# Altium PCB PCB1.PcbDoc
Units mil, origin at the board's own origin, x right, y up, seen from the top; angles counter-clockwise.
Board outline 2062.9 x 1175.4 mil, 2 copper layers (Top Layer, Bottom Layer); 13 components, 40 nets, 101 pads, 12 vias.
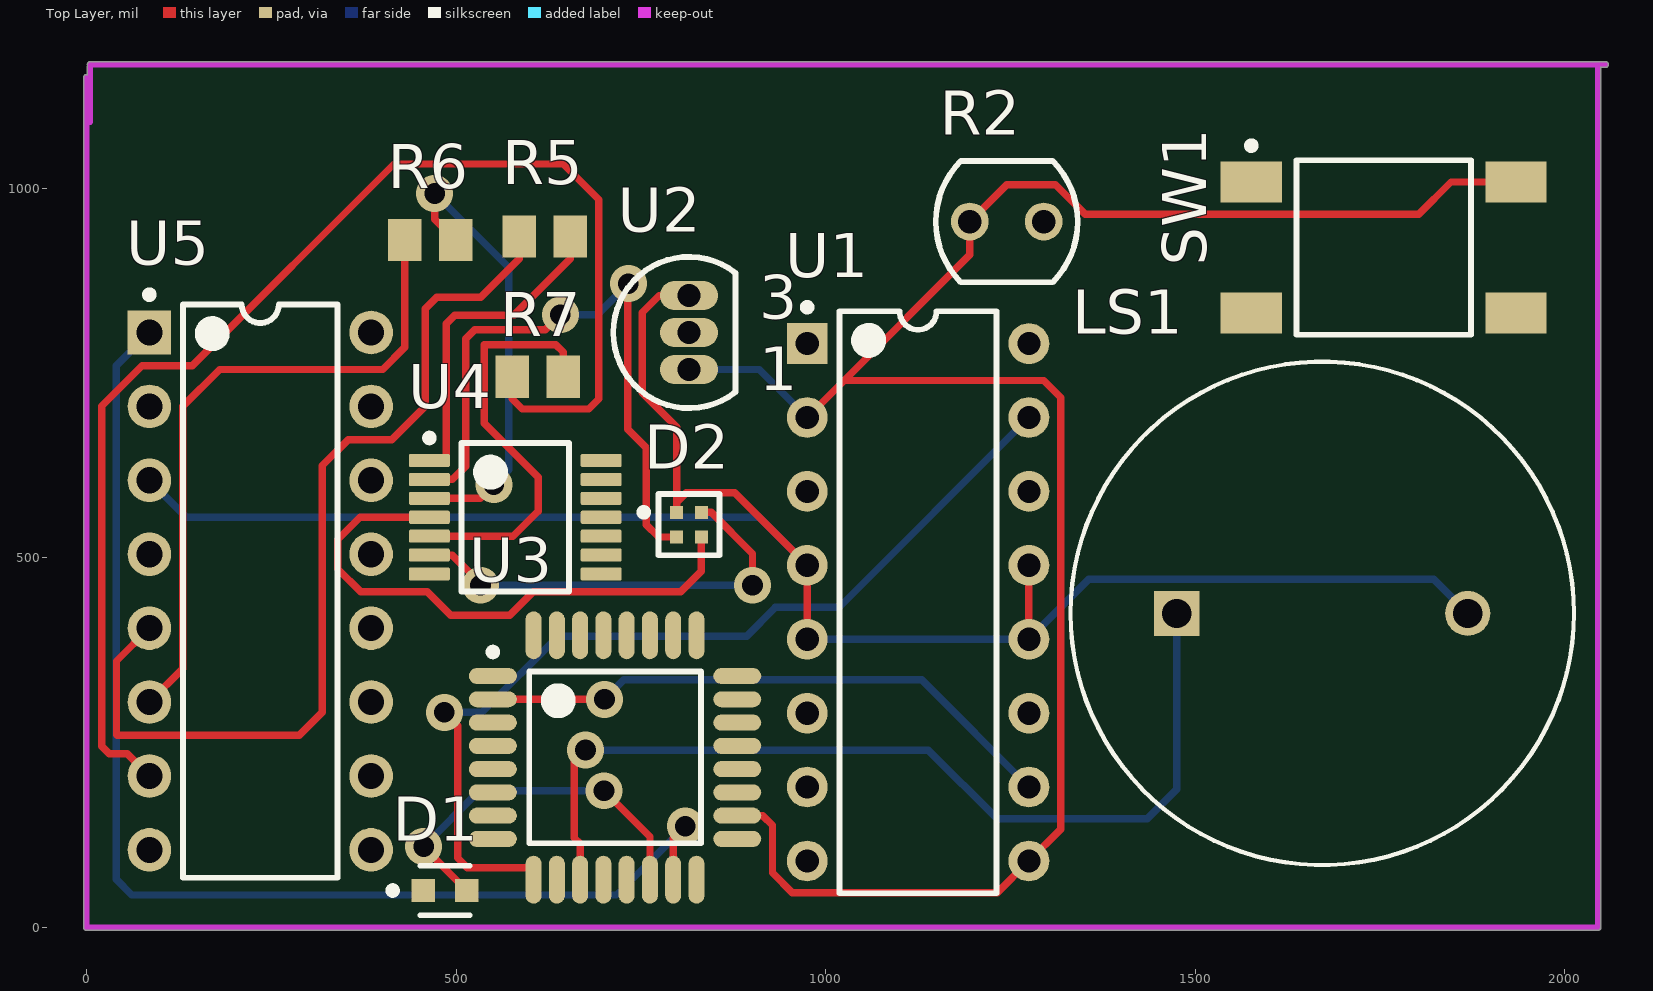
[diagram p0: Top Layer view]
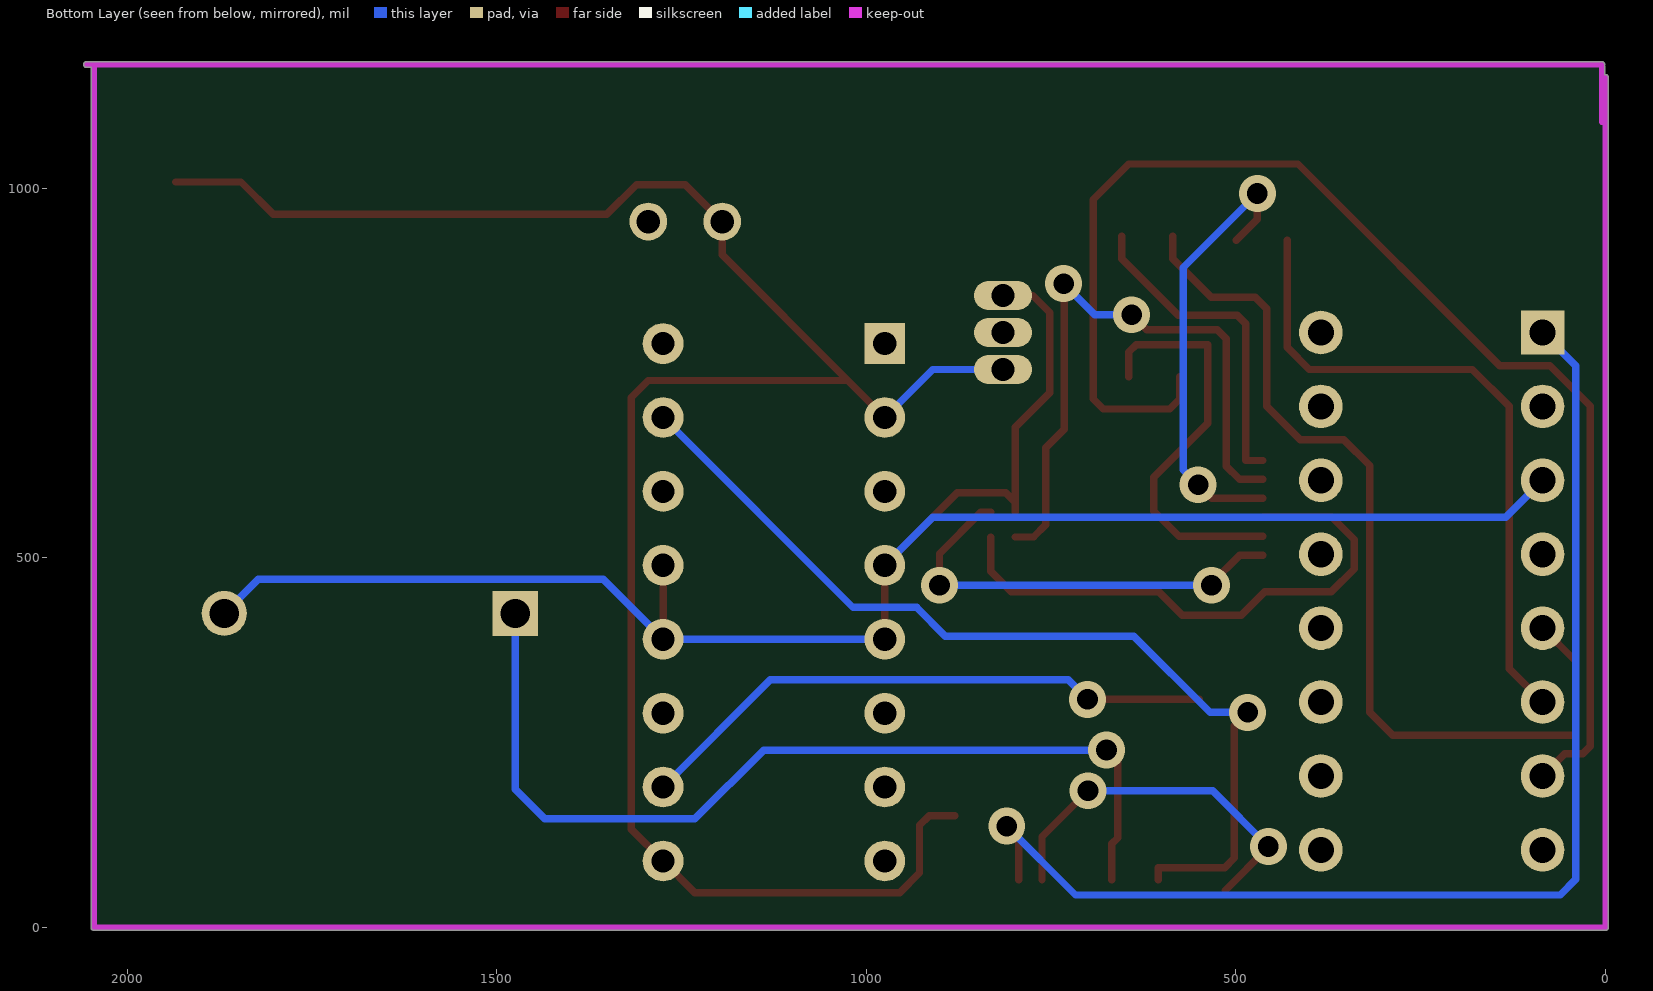
[diagram p1: Bottom Layer view, seen from below]

## Layer stack, top to bottom
Top Solder: solder mask 0.4, Solder Resist, Dk 3.5
Top Layer: signal copper 1.4
Dielectric 1: dielectric 12.6, FR-4, Dk 4.8
Bottom Layer: signal copper 1.4
Bottom Solder: solder mask 0.4, Solder Resist, Dk 3.5

## Board outline
-3.95,0 -3.95,1150 cw(c0,1150) 1.05,1153.81 1.05,1165 1.25,1166.25 cw(c5,1167.5) 5,1171.45 2055,1171.45 cw(c2055,1167.5) 2058.95,1167.5 cw(c2055,1167.5) 2055,1163.55 2048.95,1163.55 2048.95,0 cw(c2045,0) 2045,-3.95 0,-3.95 cw(c0,0)

## Design rules (kind name [scope] priority, off if disabled: settings)
Clearance [All] p1: gap=10 ignorepadtopadclearanceinfootprint=FALSE
PolygonConnect [All] p1: connectstyle=Relief reliefconductorwidth=10 reliefentries=4 polygonreliefangle="90 Angle" airgapwidth=10
RoutingVias [All] p1: holewidth=28 width=50 viastyle="Through Hole" minholewidth=28 minwidth=50 maxholewidth=28 maxwidth=50
SolderMaskExpansion [All] p1: expansion=4 istentingtop=FALSE
Width [All] p1: maxlimit=10 minlimit=10 preferedwidth=10
30 further rules are at their usual default settings.

## Components (designator, comment, footprint, x,y, rotation, side; value= is the part's Value field where it differs from the comment)
D1 "LTST-C190GKT" FP-LTST-C190GKT-MFG 485,50 r0 top
D2 "SML-LX0404SIUPGUSB" FP-SML-LX0404SIUPGUSB-MFG 815,545 r0 top
LS1 "PS1720P02" FP-PS1720P02-MFG 1671.85,425 r0 top
R2 "VT90N1" EXCE-VT90N1 1245,955 r0 top
R5 "ERJ6ENF2200V" RESC2013X70X40NL20T20 620,935 r0 top
R6 "ERJ6ENF2200V" RESC2013X70X40NL20T20 465,930 r0 top
R7 "ERJ6ENF2200V" RESC2013X70X40NL20T20 610.55,745 r0 top
SW1 "FSM6JSMA" TECO-FSM6JSMA_V 1755,920 r90 top
U1 "L293D" STM-L293D-16 1125,440 r0 top
U2 "TMP36GT9Z" ADI-T-3 815,805 r0 top
U3 "ATmega8A-AU" 32A_N 715,230 r0 top
U4 "SN74HCT04PWT" PW0014A_N 580,555 r0 top
U5 "SN74HC139N" N0016A 235,455 r0 top

## Footprints (in the part's own frame and the unit in brackets; to place one, negate y for a bottom-side part, rotate by r counter-clockwise, add the part's x,y. Pads: shape width x height; smd on the part's side, far side on the other; paste and mask are expansions set on the pad)
32A_N [mm] "Thin QFP, 32-Leads, Body 7x7mm, Pitch 0.8mm, IPC Medium Density"
  oval 1.65x0.55 smd: 1(-4.2,2.8) 2(-4.2,2) 3(-4.2,1.2) 4(-4.2,0.4) 5(-4.2,-0.4) 6(-4.2,-1.2) 7(-4.2,-2) 8(-4.2,-2.8) 17(4.2,-2.8) 18(4.2,-2) 19(4.2,-1.2) 20(4.2,-0.4) 21(4.2,0.4) 22(4.2,1.2) 23(4.2,2) 24(4.2,2.8)
  oval 0.55x1.65 smd: 9(-2.8,-4.2) 10(-2,-4.2) 11(-1.2,-4.2) 12(-0.4,-4.2) 13(0.4,-4.2) 14(1.2,-4.2) 15(2,-4.2) 16(2.8,-4.2) 25(2.8,4.2) 26(2,4.2) 27(1.2,4.2) 28(0.4,4.2) 29(-0.4,4.2) 30(-1.2,4.2) 31(-2,4.2) 32(-2.8,4.2)
  silkscreen extent -4.32,-2.95 2.95,3.75, body extent -3.5,-3.5 3.5,3.5, height 1.2
ADI-T-3 [mm] "TO, Flat Index; 3 In-Line, Axial Leads; Body Dia. 5.1mm; Leads 0.48 x 0.48 mm (max)"
  oval 2x1 hole 0.8: 1(0,-1.27) 2(0,0) 3(0,1.27)
  silkscreen extent -2.6,-2.6 1.6,2.6, body extent -2.6,-2.61 1.6,2.61, height 5.33
EXCE-VT90N1 [mm] "THD, 2-Leads, Body Width 4.17mm (Max), Height 2.29mm"
  round 1.3 hole 0.8: 1(-1.27,0) 2(1.27,0)
  silkscreen extent -2.44,-2.08 2.44,2.08, body extent -2.44,-2.09 2.44,2.09, height 2.29
FP-LTST-C190GKT-MFG [mm]
  rect 0.8x0.8 smd paste+0 mask+0: 1(-0.75,0) 2(0.75,0)
  silkscreen extent -1.92,-0.85 0.85,0.85, body extent -1.25,-0.55 1.25,0.55, height 0.25
FP-PS1720P02-MFG [mm]
  rect 1.55x1.55 hole 1 paste-2539.97 mask+0: 1(-5,0)
  round 1.55 hole 1 paste-2539.97 mask+0: 2(5,0)
  silkscreen extent -8.65,-8.65 8.65,8.65, body extent -8.75,-8.75 8.75,8.75, height 0.25
FP-SML-LX0404SIUPGUSB-MFG [mm]
  rect 0.45x0.45 smd paste+0 mask+0: 1(-0.425,0.425) 2(0.425,0.425) 3(0.425,-0.425) 4(-0.425,-0.425)
  silkscreen extent -1.67,-1.05 1.05,1.05, body extent -0.85,-0.85 0.85,0.85, height 0.25
N0016A [mm] "DIP, 16-Leads, Body 19.7x6.6mm, Pitch 2.54mm"
  rect 1.5x1.5 hole 0.9: 1(-3.81,8.89)
  round 1.5 hole 0.9: 2(-3.81,6.35) 3(-3.81,3.81) 4(-3.81,1.27) 5(-3.81,-1.27) 6(-3.81,-3.81) 7(-3.81,-6.35) 8(-3.81,-8.89) 9(3.81,-8.89) 10(3.81,-6.35) 11(3.81,-3.81) 12(3.81,-1.27) 13(3.81,1.27) 14(3.81,3.81) 15(3.81,6.35) 16(3.81,8.89)
  silkscreen extent -3.93,-9.85 2.65,10.31, body extent -3.95,-9.85 3.95,9.85, height 5.08
PW0014A_N [mm] "SOP, 14-Leads, Body 5.1x4.5mm, Pitch 0.65mm, IPC Medium Density"
  rrect22% 1.4x0.45 smd: 1(-2.95,1.95) 2(-2.95,1.3) 3(-2.95,0.65) 4(-2.95,0) 5(-2.95,-0.65) 6(-2.95,-1.3) 7(-2.95,-1.95) 8(2.95,-1.95) 9(2.95,-1.3) 10(2.95,-0.65) 11(2.95,0) 12(2.95,0.65) 13(2.95,1.3) 14(2.95,1.95)
  silkscreen extent -3.07,-2.55 1.85,2.85, body extent -3.21,-2.5 3.21,2.5, height 1
RESC2013X70X40NL20T20 [mm] "Chip Resistor, 2-Leads, Body 2.00x1.25mm, IPC Medium Density"
  rect 1.15x1.45 smd: 1(-0.875,0) 2(0.875,0)
  body extent -1.1,-0.72 1.1,0.72, height 0.7
STM-L293D-16 [mm] "DIP, 16-Leads, Body 20x6.85mm, Pitch 2.54mm"
  rect 1.4x1.4 hole 0.8: 1(-3.81,8.89)
  round 1.4 hole 0.8: 2(-3.81,6.35) 3(-3.81,3.81) 4(-3.81,1.27) 5(-3.81,-1.27) 6(-3.81,-3.81) 7(-3.81,-6.35) 8(-3.81,-8.89) 9(3.81,-8.89) 10(3.81,-6.35) 11(3.81,-3.81) 12(3.81,-1.27) 13(3.81,1.27) 14(3.81,3.81) 15(3.81,6.35) 16(3.81,8.89)
  silkscreen extent -3.93,-10 2.7,10.26, body extent -3.93,-10 3.93,10, height 5.1
TECO-FSM6JSMA_V [mm] "SMD, 4-Leads, Body 6x6mm, Pitch 4.5mm"
  rect 1.4x2.1 smd: 1(2.25,4.55) 2(2.25,-4.55) 3(-2.25,4.55) 4(-2.25,-4.55)
  silkscreen extent -3,-3 3.62,4.67, body extent -3,-5 3,5, height 7.11

## Part data
D1: library part CMP-22017-000005-2, "LED GREEN CLEAR CHIP SMD", Case Code (Imperial)=0603, Case Code (Metric)=1608, Color=Green, Forward Current=30mA, Forward Voltage=2.1V, Lens Color=Colorless, Max Operating Temperature=85°C, Min Operating Temperature=-55°C, Package Quantity=1, Power Dissipation=100mW, Reverse Voltage=5V, Test Current=10mA, Voltage=2V, Case/Package=0603, Depth=0.8mm, Dominant Wavelength=569nm, Height=0.8mm, Illumination Color=Green, Lead Free="Lead Free", Length=1.6mm, Lens Style=Clear, Lens Transparency=Clear, Luminous Intensity=6mcd, Mount="Surface Mount", Number of Elements=1, Number of LEDs=1, Number of Pins=2, Packaging="Tape and Reel", Power Rating=100mW, Radiation Hardening=No, Viewing Angle=130°, Wavelength=565nm, Width=0.8mm
D2: library part CMP-2000-07119-2, "LED RGB CLEAR SMD", Case Code (Imperial)=0404, Case Code (Metric)=1010, Color=Blue, Forward Current=2mA, Forward Voltage=2.73V, Lens Color=Colorless, Max Operating Temperature=85°C, Min Operating Temperature=-40°C, Package Quantity=2000, Power Rating=30mW, Case/Package=0404, Height=0.3mm, Lead Free="Lead Free", Length=1mm, Lens Style=Square, Lens Transparency=Clear, Luminous Intensity=20mcd, Mount="Surface Mount", Number of LEDs=3, Packaging="Tape and Reel", REACH SVHC="No SVHC", Test Current=2mA, Viewing Angle=120°, Wavelength=465nm, Width=1mm
LS1: library part CMP-08413-000001-1, "AUDIO PIEZO TRANSDUCER 30V TH", Frequency=2kHz, Manufacturer="TDK Corporation", Package=0, Temperature="-10°C to +70°C", Temperature Range High=+70°C, Temperature Range Low=-10°C, Automotive=No, Category=Speak, ComponentLink2Description=Datasheet, ComponentLink2URL=https://product.tdk.com/info/en/catalog/datasheets/piezoelectronic_buzzer_ps_en.pdf, Device Class L1=Electromechanical, Device Class L2="Audio Products", Device Class L3=Buzzers, Digikey Description="AUDIO PIEZO TRANSDUCER 30V TH", Height=8.3mm, Lead Free=Yes, Manufacturer Part Number=PS1720P02, Mouser Description="Audio Indicators & Alerts Round 17mmx8mm 2 kHz Vin=3V", Octopart=https://octopart.com/ps1720p02-tdk-154429, RoHS=TRUE, Standoff Height=0.5mm
R2: library part CMP-2000-07406-1, "Photoconductive Resistor, 200 kOhm, 100 V, 80 mW, -40 to 75 degC, 2-Pin THD, RoHS", Dark Resistance=200kohm, Manufacturer="Excelitas Technology", Operating Temperature Max=75°C, Operating Temperature Min=-40°C, Package Description="2-Pin Through Hole Device, Body Width 4.17 mm (Max), Height 2.29 mm", Power Rating=80mW, Resistance @ Lux=12kohm, Resistor Case Style=-, Voltage Rating=100V, Datasheet URL=http://datasheet.octopart.com/VT90N1-Excelitas-datasheet-10388451.pdf, Datasheet Version=09/2006, Manufacturer URL=http://www.excelitas.com/Pages/Index.aspx, Mounting Technology=ThroughHole, Package Reference=VT90N1, Packaging=Each, Product Range=-, SVHC=Cadmiumchloride(15-Jun-2015)
R5 R6 R7: library part CMP-2001-00044-1, Manufacturer=Panasonic, Part Number=ERJ6ENF2200V
SW1: library part CMP-2000-07503-1, "Switch, SPST, 24 V, -35 to 85 degC, 4-Pin SMD, RoHS, Tape and Reel", Case\/Package=SMD/SMT, Contact Current Rating=50mA, Contact Resistance=100mOhm, Insulation Resistance=100MOhm, Manufacturer="TE Connectivity", Max Operating Temperature=85degC, Max Voltage Rating (DC)=12V, Min Operating Temperature=-35degC, Operating Force=1.57N, Package Description="4-Pin Surface Mount Device, Body 6 x 6 mm, Pitch 4.5 mm", Package Quantity=750, Voltage Rating=24V, Actuator Length=3.4mm, Actuator Material=Polyamide, Contact Material=CopperAlloy, Contact Plating=Silver, Current Rating=50mA, Datasheet URL=http://www.te.com/commerce/DocumentDelivery/DDEController?Action=showdoc&DocId=Customer+Drawing%7F2-1437565-7%7FV%7Fpdf%7FEnglish%7FENG_CD_2-1437565-7_V.pdf%7F4-1437565-9, Datasheet Version="Rev. V, 02/2015", Electrical Life=100000Cycles, ELV=Compliant, Illumination Type=Illuminated, Lead Free=LeadFree, Length=6mm, Manufacturer URL=http://www.te.com/, Mechanical Life=100000Cycles, Mount=SurfaceMount, Mounting Technology=SurfaceMount, Orientation=Straight, Package Reference=FSM6JSMA, Packaging=LoosePiece, REACH SVHC=Unknown, RoHSCompliant=true, Switch Travel=0.25mm, Termination=GullWing, Throw Configuration=SPST, Voltage Rating (DC)=24V, Width=6mm
U1: library part CMP-2000-06524-1, "Push-Pull Four Channel Driver with Diode, 4.5 to 36 V, -40 to 150 degC, 16-Pin PDIP, RoHS, Tube", Current - Output / Channel=600mA, Current - Peak Output=1.2A, Manufacturer=STMicroelectronics, On-State Resistance=-, Operating Temperature=-40°C~150°C, Package / Case="16-DIP(0.300\",7.62mm)", Package Description="16-Pin Thru-Hole Dual-In-Line, Body 20 x 6.85 mm, Pitch 2.54 mm", Package Reference=DIP-16, Standard Package=25, Supplier Device Package=16-PowerDIP, Voltage - Supply=4.5V~36V, Category=IntegratedCircuits(ICs), Datasheet URL=http://www.st.com/st-web-ui/static/active/en/resource/technical/document/datasheet/CD00000059.pdf, Datasheet Version=07/2003, Dynamic Catalog=HalfBridge, Family=PMIC-MOSFET,BridgeDrivers-InternalSwitch, Input Type=Non-Inverting, Manufacturer URL=http://www.st.com/, Mounting Technology=ThroughHole, Mounting Type=ThroughHole, Number of Outputs=4, Other Names=497-2936-5, Other Related Documents=L293DViewAllSpecifications, Packaging=Tube, PartNumber=L293D, Series=-, Type=HalfBridge
U2: library part CMP-0887-00067-1, "Low Voltage Temperature Sensor, 2.7 to 5.5 V Supply, Industrial, 3-pin TO92 (T-3), Tray", Manufacturer="Analog Devices", Supply Voltage Range="2.7 to 5.5 V", Code_JEDEC=TO-226-AA, ComponentLink1Description="Manufacturer URL", ComponentLink1URL=http://www.analog.com/en/index.html, ComponentLink2Description=Datasheet, ComponentLink2URL=http://www.analog.com/static/imported-files/data_sheets/TMP35_36_37.pdf, ComponentLink3Description="Package Specification", ComponentLink3URL=http://www.analog.com/static/imported-files/packages/PKG_PDF/TO-92(T)/T_3.pdf, ComponentLink4Description="Product URL", ComponentLink4URL=http://www.analog.com/en/mems-sensors/digital-temperature-sensors/tmp36/products/product.html, DatasheetVersion="Rev. F", Mounting Technology="Through Hole", PackageDescription="3-Pin Plastic Header-Style Package, 1.27 mm Pitch", PackageReference=T-3, PackageVersion="042208-A, 04/2008", Packing=Tray, PartNumber=TMP36GT9Z
U3: library part CMP-0095-00219-2, "8-bit AVR Microcontroller, 2.7-5.5V, 16MHz, 8KB Flash, 512 Bytes EEPROM, 1KB SRAM, 32-pin TQFP, Industrial Grade (-40°C to 85°C)", Code_JEDEC=MS-026-ABA, ComponentLink1Description="Manufacturer URL", ComponentLink1URL=http://www.atmel.com/, ComponentLink2Description="ATmega8A Datasheet", ComponentLink2URL=http://www.atmel.com/dyn/resources/prod_documents/doc8159.pdf, ComponentLink3Description="ATmega8A Summary", ComponentLink3URL=http://www.atmel.com/dyn/resources/prod_documents/8159S.pdf, DatasheetVersion="revD, Feb-2011", PackageDescription="32-Lead, 7x7x1.0 mm Body, 0.8mm Lead Pitch, Thin Profile Plastic Quad Flat Package (TQFP)", PackageReference=32A, PackageVersion="revC, Oct-2010", RevisionNote="DatasheetVersion & PackageVersion updated. URLs added."
U4: library part CMP-1615-00087-3, "Hex Inverters, PW0014A, SMALL T&R", F @ Nom Voltage(Max)(Mhz)=25, Generic Part Number=SN74HCT04, ICC @ Nom Voltage(Max)(mA)=0.02, Manufacturer="Texas Instruments", Operating Temperature Range(C)="-40 to 85", Rating=Catalog, tpd @ Nom Voltage(Max)(ns)=23, Voltage(Nom)(V)=5, Bits(#)=6, Code_JEDEC=MO-153, DatasheetVersion=SCLS042D, Input Type=TTL, Output Drive (IOL/IOH)(Max)(mA)=-4/4, Output Type=CMOS, PackageReference=PW0014A, Schmitt Trigger=No, Technology Family=HCT, VCC(Max)(V)=5.5, VCC(Min)(V)=4.5
U5: library part CMP-1633-00660-2, "Dual 2-Line To 4-Line Decoders/Demultiplexers, N0016A, TUBE", F @ Nom Voltage(Max)(Mhz)=28, Generic Part Number=SN74HC139, ICC @ Nom Voltage(Max)(mA)=0.08, Manufacturer="Texas Instruments", Operating Temperature Range(C)="-40 to 85", Rating=Catalog, tpd @ Nom Voltage(Max)(ns)=44, Voltage(Nom)(V)=3.3,5, Bits(#)=4, Channels(#)=2, Code_JEDEC=MS-001, Configuration=2：4, DatasheetVersion=SCLS108D, Function=Decoder/Demultiplexer, Input Type=LVTTL/CMOS, Output Drive (IOL/IOH)(Max)(mA)=5.2/-5.2, Output Type=CMOS, PackageReference=N0016A, Schmitt Trigger=No, Technology Family=HC, Type=Standard, VCC(Max)(V)=6, VCC(Min)(V)=2

## Via types
v1: diameter 50, hole 28, Top Layer to Bottom Layer, 12 vias

## Nets (pads, with @x,y where several pads share a name; then routed paths per layer and width w, separated by ;. In a path a pad name is that pad's centre, name@x,y a point inside that pad or via, vN(x,y) a via of type N, cw(c..) or ccw(c..) an arc to the next point about the centre after c; other vN are vias at no path point)
+5: R2.1 SW1.2 U1.2 U1.9 U2.1 U3.18 | length 2778.1
  Top Layer w10: U3.18 915,151.26 928,138.26 928,74 955,47 1232,47 U1.9 1318,133 1318,717 1295,740 1025,740 ; U1.2 1025,740 ; SW1.2 1846,1008.58 1802.42,965 1351,965 1311,1005 1245,1005 R2.1 1195,910 1025,740
  Bottom Layer w10: U2.1 910,755 U1.2
BUZZER: LS1.1 U3.11 | length 1277.9
  Top Layer w10: U3.11 667.76,113.24 660,121 660,225 v1(675,240)
  Bottom Layer w10: v1(675,240) 1139,240 1232,147 1435,147 1475,187 LS1.1
DOOR_INT: U3.1
Door_Motor_IN1: U1.10 U3.2 | length 796.3
  Top Layer w10: U3.2 v1(700.74,308.74)
  Bottom Layer w10: v1(700.74,308.74) 727,335 1130,335 U1.10
Door_Motor_IN2: U1.15 U3.9 | length 1285.2
  Top Layer w10: v1(484,291) 502,273 502,94 515,81 604.76,81 U3.9
  Bottom Layer w10: v1(484,291) 535,291 638,394 893,394 932,433 1018,433 U1.15
DOOR_MOTOR_OUT1: U1.11
DOOR_MOTOR_OUT2: U1.14
FAAN_PWM_EN: U3.13
FAN_OUT1: U1.3
FAN_OUT2: U1.6
FAN_PWM_EN: U1.1
GND: D2.1 LS1.2 U1.4 U1.5 U1.12 U1.13 U2.3 U5.3 | length 2668.6
  Top Layer w10: D2.1 798.27,575 ; U2.3 775,855 752,832 752,723.32 798.27,677.05 798.27,575 ; U1.5 U1.4 877,588 811.27,588 798.27,575 ; U1.12 U1.13
  Bottom Layer w10: U5.3 135,555 910,555 U1.4 ; U1.5 U1.12 1356,471 1822.7,471 LS1.2
keypad_1: U3.27
keypad_2: U3.28
KEYPAD_3: U3.10
keypad_A: U3.23
keypad_B: U3.24
keypad_C: U3.25
keypad_D: U3.26
LIGHTING: D1.2 U3.14 | length 505.1
  Top Layer w10: v1(456,109.47) 456,108.53 D1.2 ; v1(700,185) 762.24,122.76 U3.14
  Bottom Layer w10: v1(456,109.47) 531.53,185 v1(700,185)
NetD1_1: D1.1
NetD2_2: D2.2 U4.6 | length 590.9
  Top Layer w10: U4.6 495,503.82 533,465.82 v1(533,463) ; D2.2 845,561.73 901,505.73 v1(901,463)
  Bottom Layer w10: v1(533,463) v1(901,463)
NetD2_3: D2.3 U4.4 | length 765.1
  Top Layer w10: U4.4 370,555 340,525 340,485 371,454 460.9,454 492.5,422.4 572.5,422.4 604.1,454 804,454 831.73,481.73 D2.3
NetD2_4: D2.4 U4.2 | length 864.8
  Top Layer w10: U4.2 495,606.18 513,624.18 513,796.55 525,808.55 620.55,808.55 v1(641,829) ; v1(733,871) 732,870 732,674 757,649 757,545 773.73,528.27 D2.4
  Bottom Layer w10: v1(641,829) 691,829 v1(733,871)
NetLabel24: U3.19
NetLabel25: U3.22
NetR1_2: SW1.3
NetR2_2: R2.2
NetR5_1: R5.1 U5.5 | length 1278.3
  Top Layer w10: U5.5 40.47,360.47 40.47,261 41.47,260 288,260 319,291 319,625 354,660 413,660 458,705 458,837.32 473.61,852.93 533.48,852.93 585.55,905 R5.1
NetR5_2: R5.2 U4.1 | length 442.2
  Top Layer w10: U4.1 486.42,631.77 486.42,816.96 498,828.55 577.99,828.55 654.45,905 R5.2
NetR6_1: R6.1 U5.6 | length 897.3
  Top Layer w10: U5.6 130,350 130,705 180,755 400.55,755 430.55,785 R6.1
NetR6_2: R6.2 U4.3 | length 613.3
  Top Layer w10: U4.3 532.59,580.59 v1(551,599) ; v1(471,993) 471,958.45 R6.2
  Bottom Layer w10: v1(471,993) 571,893 571,619 v1(551,599)
NetR7_1: R7.1 U5.7 | length 1797.8
  Top Layer w10: U5.7 55,235 30.47,235 20.47,245 20.47,705.47 75,760 143,760 416,1033 645,1033 693,985 693,715 679.45,701.45 589.65,701.45 576.1,715 R7.1
NetR7_2: R7.2 U4.5 | length 561.3
  Top Layer w10: U4.5 577,529.41 611,563.41 611,609 538,682 538,788.55 635,788.55 645,778.55 R7.2
"PIR SENSOR": U3.32
RGB_A: U3.15 U5.1 | length 1654.9
  Top Layer w10: U3.15 793.74,120.74 v1(810,137)
  Bottom Layer w10: U5.1 40,760 40,65 61,44 717,44 v1(810,137)
RGB_B: U3.16
TMP36: U2.2
USART_RX: U3.30
USART_TX: U3.31
pads on no net: SW1.1 SW1.4 U1.7 U1.8 U1.16 U3.3 U3.4 U3.5 U3.6 U3.7 U3.8 U3.12 U3.17 U3.20 U3.21 U3.29 U4.7 U4.8 U4.9 U4.10 U4.11 U4.12 U4.13 U4.14 U5.2 U5.4 U5.8 U5.9 U5.10 U5.11 U5.12 U5.13 U5.14 U5.15 U5.16

## Keep-outs
Keep-Out Layer:
  lines w7.87: 0,1150 0,0 2045,0 2045,1167.5 ; 5,1090 5,1165 ; 5,1167.5 517.5,1167.5 1542.5,1167.5 2055,1167.5

## Text inside footprints (layer, text, board x,y; h text height)
U2: Top Overlay "3" at 910.32,823.39 h59.05; Top Overlay "1" at 910.32,727.09 h59.05